# Altium PCB radxa_nx5_io_board_v1.4.PcbDoc (part 4 of 6)
Units mil, origin at the board's own origin, x right, y up, seen from the top; angles counter-clockwise.
Board outline 3937.73 x 3112.19 mil, 6 copper layers (Top, GND02, 内层3, Power4, 内层 5, Bottom), stack 58.1 mil thick; 363 components, 344 nets, 1618 pads, 1594 vias.
Unrouted connection lines stored in the file: 899.
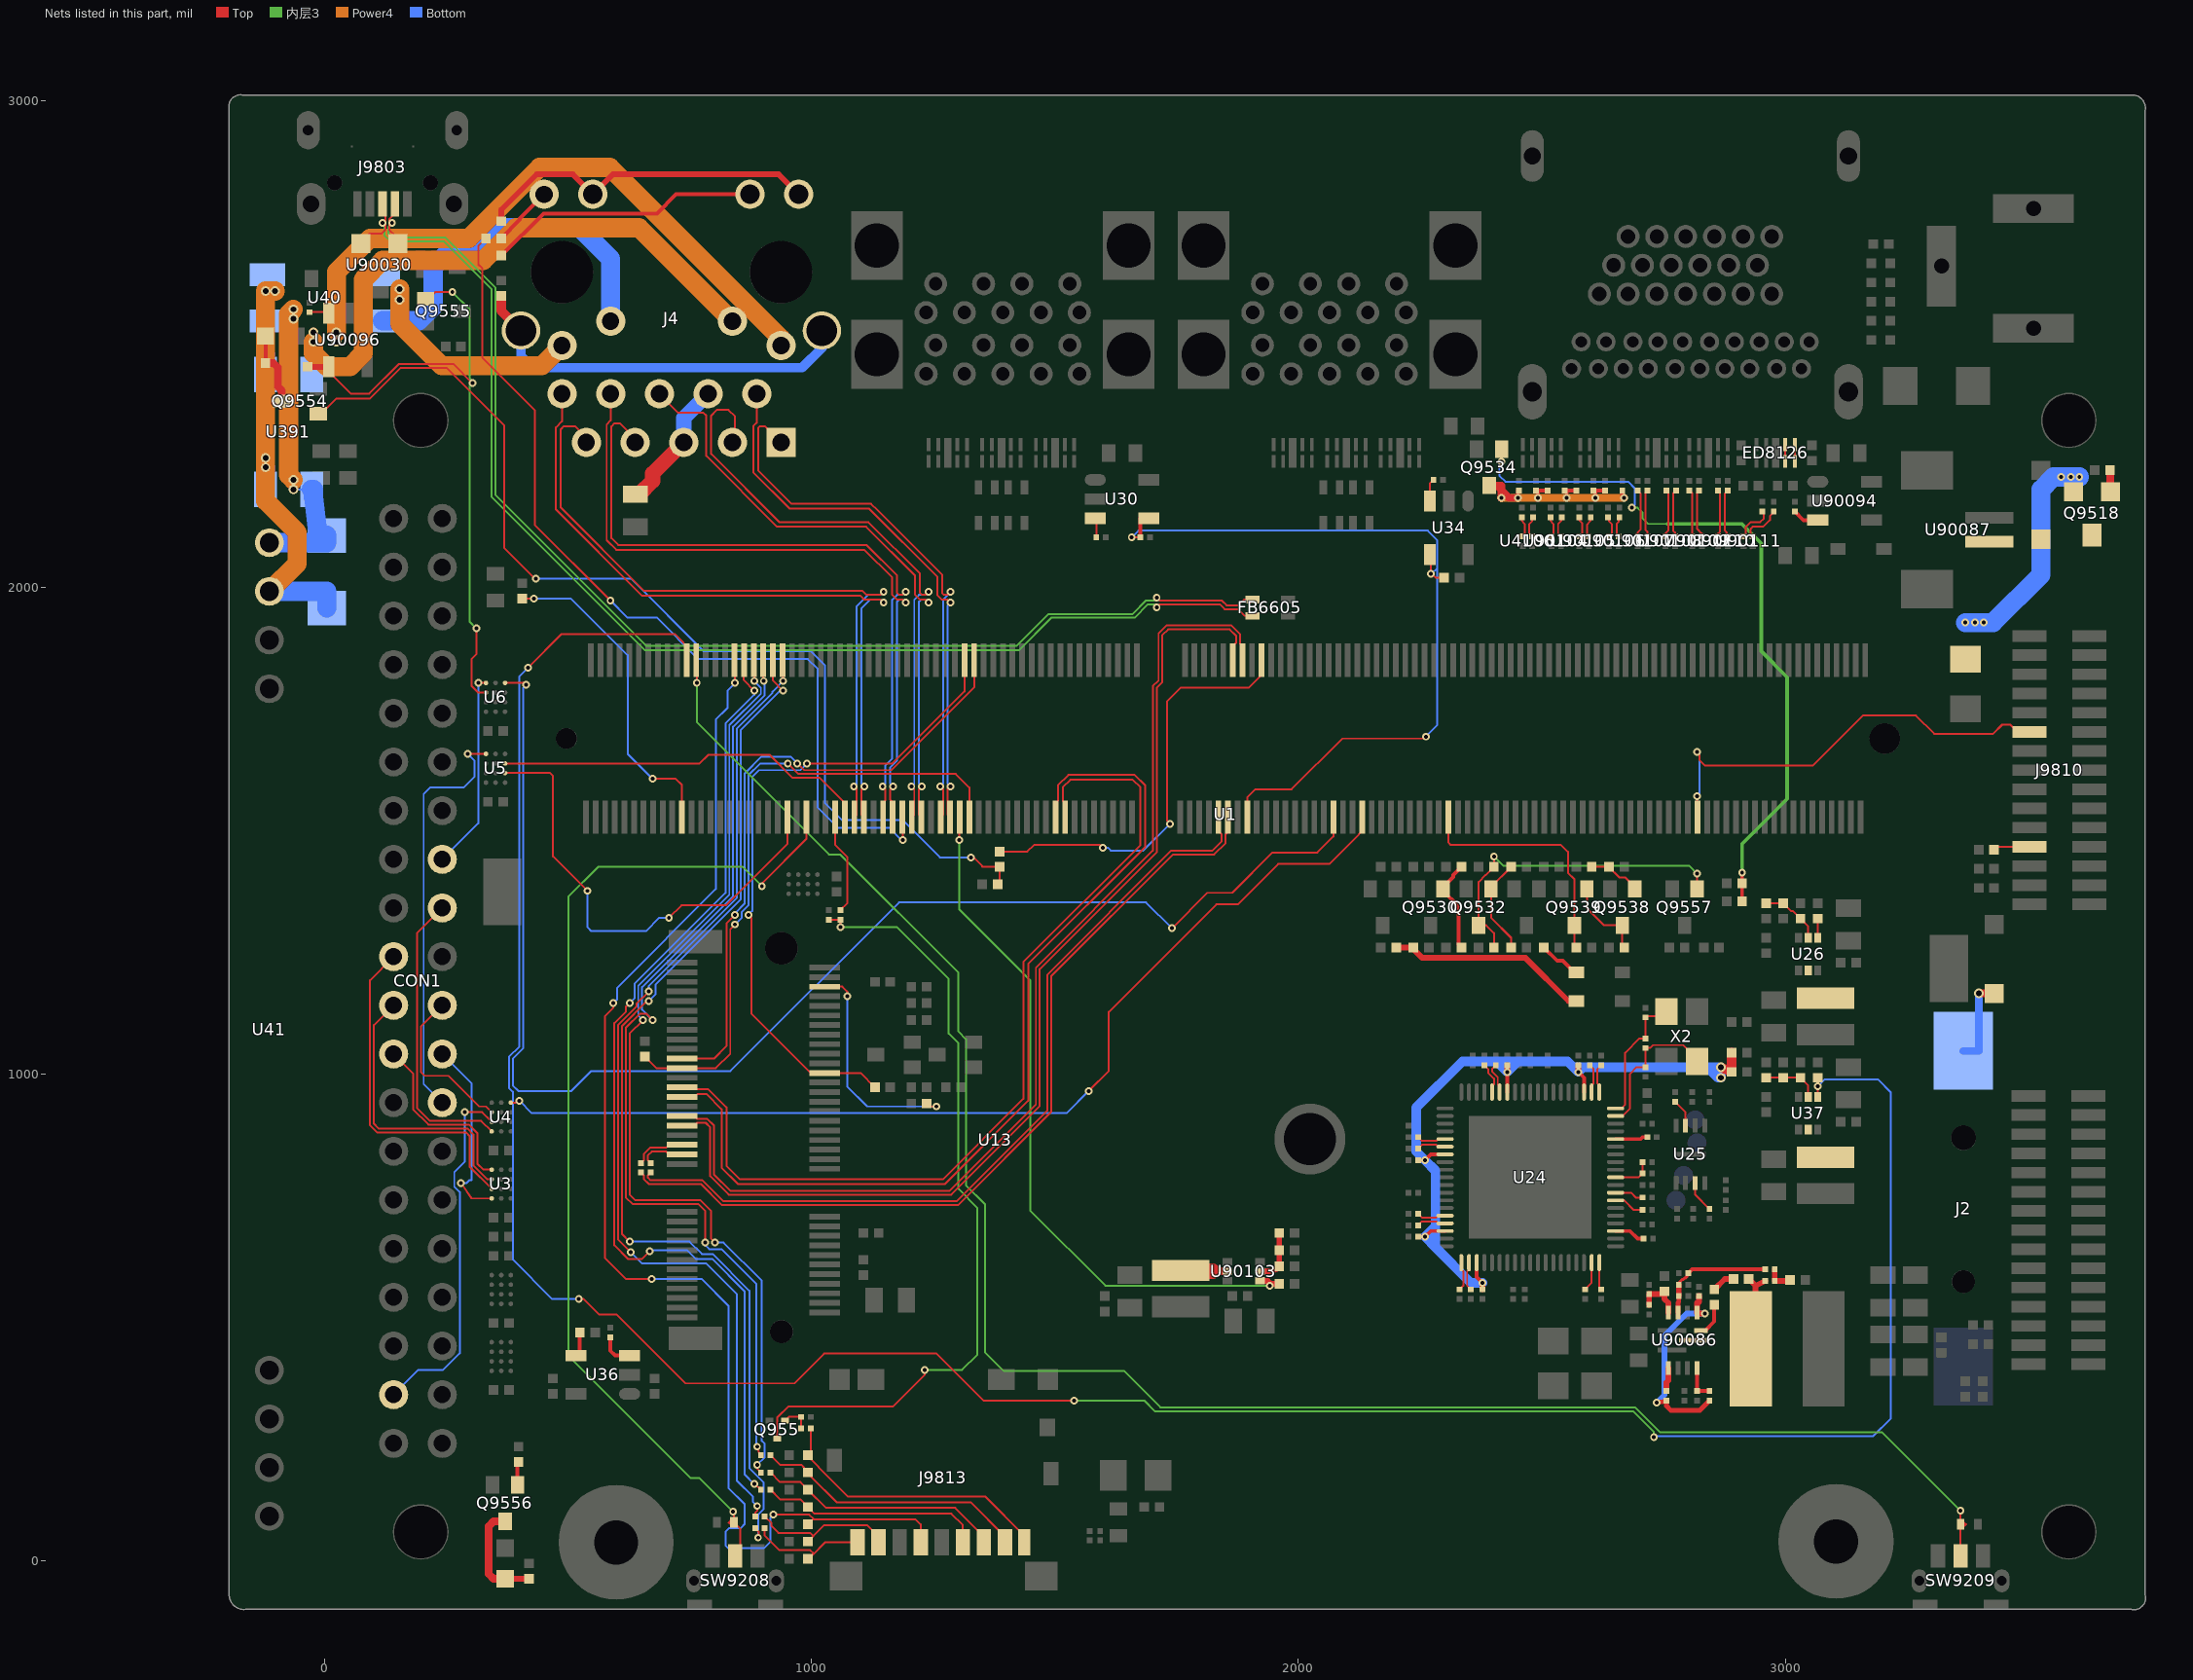
[diagram p7: the nets of this part, all layers, seen from the top]

## Via types
v1: diameter 15.75, hole 7.87, Top to Bottom, 1425 vias
v2: diameter 19.68, hole 11.81, Top to Bottom, 169 vias

## Nets (pads, with @x,y where several pads share a name; then routed paths per layer and width w, separated by ;. In a path a pad name is that pad's centre, name@x,y a point inside that pad or via, vN(x,y) a via of type N, cw(c..) or ccw(c..) an arc to the next point about the centre after c; other vN are vias at no path point) (continued)
MIPI_DPHY0_RX_D1P: J9810.10 U1.36 | length 912.1
  Top w3.94: v1(2818.9,1570.87) 2818.9,1527.56 U1.36@2819.88,1527.56 ; v1(2818.9,1661.42) 2823.82,1656.5 2823.82,1644.69 2834.65,1633.86 3057.09,1633.86 3159.45,1736.22 3268.7,1736.22 3306.1,1698.82 3427.17,1698.82 3445.87,1717.52 3462.6,1717.52 3477.36,1702.76 J9810.10@3501.97,1702.76
  Bottom w3.94: v1(2818.9,1570.87) 2823.82,1575.79 2823.82,1656.5 v1(2818.9,1661.42)
N31363: C63.2 J4.4 J4.5 | length 272.7
  Top w31.5: C63.2@637.8,2190.94 645.67,2190.94 673.23,2218.5 673.23,2233.46 J4.5@737.01,2297.24
  Bottom w31.5: J4.5@737.01,2297.24 737.01,2347.24 J4.4@787.01,2397.24
N31433: J4.12 U391.1 | length 1253
  Power4 w19.68: v2(-23.62,2503.94) v2(-23.62,2523.62)
  Power4 w39.37: v2(-23.62,2503.94) -23.62,2480.32 3.94,2452.76 51.18,2452.76 78.74,2480.32 78.74,2631.89 118.11,2671.26 325.28,2671.26 392.21,2738.19 645.28,2738.19 J4.12@837.01,2546.46
  Bottom w3.94: -23.62,2513.78 v2(-23.62,2523.62)
  Bottom w39.37: U391.1@-122.05,2437.01 -122.05,2478.35
N31443: J4.11 U391.2 | length 1305.7
  Power4 w19.68: v2(23.62,2503.94) v2(23.62,2523.62)
  Power4 w39.37: v2(23.62,2523.62) 23.62,2647.64 92.52,2716.54 295.28,2716.54 440.94,2862.2 585.29,2862.2 937.01,2510.49 J4.11@937.01,2496.46
N31463: J4.14 U40.1 | length 457.5
  Power4 w39.37: v2(153.54,2612.2) 153.54,2541.34 240.16,2454.72 445.28,2454.72 J4.14@487.01,2496.46
  other v2: 153.54,2590.55
N31467: J4.13 U40.2 | length 749.6
  Bottom w39.37: U40.2@118.11,2547.24 192.91,2547.24 222.44,2576.77 222.44,2657.48 259.84,2694.88 318.9,2694.88 362.2,2738.19 523.23,2738.19 587.01,2674.41 J4.13@587.01,2546.46
N8208224: R103.1 U24.46 | length 59.2
  Top w3.94: U24.46@2651.57,755.91 2683.07,755.91 2692.91,746.06 R103.1@2706.69,746.06
N8208306: C92.1 C96.1 C97.1 C98.1 C99.1 C100.1 FB1.2 U24.7 U24.17 U24.22 U24.60 U24.70 | length 1824
  Top w7.87: C99.1@2246.06,665.35 v1(2259.84,665.35) 2271.65,677.17 U24.17@2301.18,677.17 ; C98.1@2246.06,822.83 v1(2259.84,822.83) 2271.65,834.65 U24.7@2301.18,834.65 ; U24.22@2366.14,612.2 2366.14,582.68 v1(2377.95,570.87) ; U24.70@2429.13,962.6 v1(2429.13,1003.94) ; v1(2574.8,1003.94) 2586.61,992.13 U24.60@2586.61,962.6
  Top w11.81: C100.1@2377.95,557.09 v1(2377.95,570.87) ; v1(2429.13,1003.94) C97.1@2429.13,1017.72 ; v1(2574.8,1003.94) C96.1@2574.8,1017.72
  Top w19.68: v2(2868.11,1013.78) C92.1@2889.76,1003.94 FB1.2@2889.76,1043.31
  Bottom w19.68: v1(2377.95,570.87) 2354.33,570.87 2281.5,643.7 ; 2281.5,643.7 2281.5,687.01 ; 2281.5,643.7 v1(2259.84,665.35) 2281.5,687.01 ; 2281.5,643.7 2281.5,801.18 ; 2281.5,687.01 2281.5,801.18 ; 2281.5,801.18 v1(2259.84,822.83) 2242.13,840.55 2242.13,931.04 2336.67,1025.59 2407.48,1025.59 ; 2407.48,1025.59 v1(2429.13,1003.94) 2450.79,1025.59 ; 2407.48,1025.59 2450.79,1025.59 ; 2450.79,1025.59 2553.15,1025.59 2564.96,1013.78 ; 2564.96,1013.78 v1(2574.8,1003.94) 2584.65,1013.78 ; 2564.96,1013.78 2584.65,1013.78 ; 2584.65,1013.78 2842.52,1013.78 ; 2842.52,1013.78 2842.52,1011.53 2861.93,992.13 v2(2868.11,992.13) v2(2868.11,1013.78) 2842.52,1013.78
N8208450: C72.1 U24.59 | length 60
  Top w3.94: C72.1@2598.43,1017.72 2606.3,1009.84 2606.3,980.32 2602.36,976.38 U24.59@2602.36,962.6
N8208452: C73.1 U24.58 | length 60
  Top w3.94: U24.58@2618.11,962.6 2618.11,976.38 2614.17,980.32 2614.17,1009.84 C73.1@2622.05,1017.72
N8208466: C74.1 U24.21 | length 60
  Top w3.94: U24.21@2350.39,612.2 2350.39,598.43 2346.46,594.49 2346.46,564.96 C74.1@2354.33,557.09
N8208470: C75.1 U24.20 | length 60
  Top w3.94: C75.1@2330.71,557.09 2338.58,564.96 2338.58,594.49 2334.65,598.43 U24.20@2334.65,612.2
N8208482: C77.1 U24.16 | length 60
  Top w3.94: C77.1@2246.06,688.98 2253.94,696.85 2283.46,696.85 2287.4,692.91 U24.16@2301.18,692.91
N8208486: C78.1 U24.15 | length 60
  Top w3.94: C78.1@2246.06,712.6 2253.94,704.72 2283.46,704.72 2287.4,708.66 U24.15@2301.18,708.66
N8208498: C79.1 U24.6 | length 60
  Top w3.94: C79.1@2246.06,846.46 2253.94,854.33 2283.46,854.33 2287.4,850.39 U24.6@2301.18,850.39
N8208502: C80.1 U24.5 | length 60
  Top w3.94: C80.1@2246.06,870.08 2253.94,862.2 2283.46,862.2 2287.4,866.14 U24.5@2301.18,866.14
N8208518: C83.1 R101.1 U24.57 X2.1 | length 274.3
  Top w3.94: U24.57@2651.57,929.13 2663.39,929.13 2671.26,937.01 2671.26,1043.31 2700.79,1072.83 R101.1@2712.6,1072.83 C83.1@2712.6,1116.14 2714.57,1118.11 2732.28,1118.11 2742.13,1127.95 X2.1@2755.91,1127.95
N8208522: C84.1 R101.2 U24.56 X2.3 | length 309
  Top w3.94: U24.56@2651.57,913.39 2665.35,913.39 2681.1,929.13 2681.1,1000 2694.88,1013.78 C84.1@2712.6,1013.78 R101.2@2712.6,1053.15 2722.44,1053.15 2728.35,1059.06 2790.35,1059.06 2818.9,1030.51 X2.3@2818.9,1025.59
N8208552: R96.2 U24.38 | length 56.7
  Top w3.94: U24.38@2618.11,612.2 2618.11,561.02 R96.2@2622.05,557.09
N8208556: R97.2 U24.37 | length 60.8
  Top w3.94: R97.2@2588.58,557.09 2602.36,570.87 U24.37@2602.36,612.2
N8208578: C76.1 R99.2 U24.48 | length 82
  Top w3.94: U24.48@2651.57,787.4 2698.82,787.4 R99.2@2706.69,795.28 C76.1@2706.69,818.9
N8214601: R95.2 U24.45 | length 63.3
  Top w3.94: U24.45@2651.57,740.16 2669.29,740.16 2688.98,720.47 R95.2@2706.69,720.47
N8214608: R98.2 U24.53 | length 66.6
  Top w7.87: U24.53@2651.57,866.14 2702.76,866.14 2706.69,870.08 R98.2@2716.54,870.08
N8219540: R106.2 U25.3 | length 58.2
  Top w3.94: R106.2@2773.62,942.91 2795.28,921.26 U25.3@2795.28,893.7
N8219562: R105.1 U25.7 | length 65.4
  Top w3.94: U25.7@2814.96,775.59 2814.96,751.97 R105.1@2844.49,722.44
N16880188: R116.1 U34.3 | length 46.6
  Top w3.94: U34.3@2269.69,2177.17 2269.69,2212.6 R116.1@2277.56,2220.47
N16895636: C55.1 U13.37 | length 106.8
  Top w3.94: C55.1@649.61,816.93 655.51,822.83 655.51,835.94 668,848.43 700.79,848.43 706.69,854.33 U13.37@733.27,854.33
N16895637: C54.1 U13.35 | length 93.8
  Top w3.94: C54.1@669.29,816.93 663.39,822.83 663.39,832.68 671.26,840.55 700.79,840.55 706.69,834.65 U13.35@733.27,834.65
N16926774: J4.16 R76.2 | length 563.2
  Top w7.87: R76.2@362.2,2681.1 448.82,2767.72 682.25,2767.72 721.62,2807.09 J4.16@873.23,2807.09
N16926816: J4.18 R77.2 | length 127.1
  Top w7.87: R77.2@362.2,2716.54 400.61,2754.94 400.61,2757.31 J4.18@450.39,2807.09
N16926840: J4.15 J4.17 R75.2 | length 716
  Top w11.81: R75.2@362.2,2751.97 362.2,2775.24 435.39,2848.43 509.06,2848.43 J4.17@550.39,2807.09 591.73,2848.43 931.89,2848.43 J4.15@973.23,2807.09
N16927009: J4.19 J4.20 R78.2 | length 821.3
  Top w19.68: R78.2@362.2,2598.43 362.2,2567.72 J4.20@402.76,2527.16
  Bottom w19.68: J4.20@402.76,2527.16 402.76,2474.41 426.38,2450.79 980.32,2450.79 1020.86,2491.34 J4.19@1020.86,2527.16
N16942624: L4.1 U37.2
N16942632: C119.2 R123.2 R125.1 U37.5 | length 116.8
  Top w3.94: C119.2@2960.63,992.13 R123.2@2996.06,992.13 R125.1@3031.5,992.13 3047.24,976.38 U37.5@3047.24,952.76
N16950563: R110.2 U26.4 | length 39.4
  Top w3.94: U26.4@3066.93,1279.53 R110.2@3066.93,1318.9
N16950595: L2.1 U26.2
N16950615: C104.2 R111.2 R112.1 U26.5 | length 129.8
  Top w3.94: C104.2@2960.63,1350.39 R111.2@2996.06,1350.39 3011.81,1334.65 3015.75,1334.65 R112.1@3031.5,1318.9 3047.24,1303.15 U26.5@3047.24,1279.53
N16960074: J9810.4 R126.2 | length 75.3
  Top w3.94: R126.2@3429.13,1460.63 3435.04,1466.54 J9810.4@3501.97,1466.54
N16982620: R109.2 U24.41 | length 63.6
  Top w7.87: U24.41@2651.57,677.17 2681.1,677.17 2696.85,661.42 R109.2@2708.66,661.42
N16984009: C124.1 U36.4 | length 55.1
  Top w7.87: U36.4@515.74,421.26 523.62,421.26 C124.1@523.62,468.5
N16984023: R124.2 U36.3 | length 71
  Top w7.87: R124.2@586.61,458.66 586.61,431.1 596.46,421.26 U36.3@625.98,421.26
N16984557: D1.1 J2.1 | length 181.2
  Top w15.75: v2(3397.64,1165.35) D1.1@3429.13,1165.35
  Bottom w15.75: J2.1@3366.14,1047.16 3397.64,1047.16 v2(3397.64,1165.35)
N17002194: D6.1 J9813.9 R953.1 | length 589.4
  Top w3.94: R953.1@998.03,271.65 998.03,216.54 D6.1@992.08,216.54 998.56,210.05 998.56,208.08 1013.78,192.87 1013.78,191.94 1073.83,131.89 1356.1,131.89 1436.52,51.48 J9813.9@1436.52,37.7
N17002200: Q955.3 R144.1 R145.2 | length 1622.9
  Top w3.94: Q955.3@929.04,250.39 929.04,293.69 952.28,316.93 1167.32,316.93 1232.28,381.89 v1(1232.28,391.73) ; R144.1@1035.43,1316.93 R145.2@1059.06,1316.93 v1(1059.06,1301.18)
  内层3 w3.94: v1(1059.06,1301.18) 1175.2,1301.18 1281.5,1194.88 1281.5,1082.68 1301.18,1062.99 1301.18,763.78 1340.55,724.41 1340.55,423.23 1309.06,391.73 v1(1232.28,391.73)
  Bottom w3.94: v1@1059.06,1297.24 v1(1059.06,1301.18) v1@1061.02,1299.21
N17002392: D11.1 J9813.2 R139.2 | length 505.2
  Top w3.94: R139.2@915.35,181.1 935.04,161.42 977.03,161.42 992.08,146.36 D11.1@992.08,145.67 1029.48,108.27 1295.08,108.27 1353.84,49.51 J9813.2@1353.84,37.7
N17002394: D10.1 J9813.3 R140.2 | length 460.9
  Top w3.94: R140.2@915.35,145.67 935.04,125.98 977.03,125.98 992.08,110.93 D10.1@992.08,110.24 1005.86,96.46 1286.91,96.46 1310.53,72.83 J9813.3@1310.53,37.7
N17002404: D7.1 J9813.8 R142.2 | length 262.1
  Top w3.94: R142.2@903.54,66.93 903.54,51.38 933.27,21.65 996.83,21.65 1003.31,15.17 D7.1@992.08,3.94 998.56,10.42 1000.53,10.42 1027.81,37.7 J9813.8@1094,37.7
N17002416: D12.1 J9813.1 R138.2 | length 565.1
  Top w3.94: R138.2@915.35,216.54 935.04,196.85 978.35,196.85 984.2,190.99 984.2,189.67 992.08,181.8 D12.1@992.08,181.1 998.56,174.62 998.56,172.65 1051.13,120.08 1326.57,120.08 1397.15,49.51 J9813.1@1397.15,37.7
N17002424: D8.1 J9813.7 R141.2 | length 316.1
  Top w3.94: R141.2@903.54,90.55 917.32,76.77 917.32,71.06 931.3,57.09 996.83,57.09 1003.31,50.6 D8.1@992.08,39.37 1025.54,72.83 1113.98,72.83 1137.3,49.51 J9813.7@1137.3,37.7
N17031686: D90009.1 U40.4 U41.2 U391.4 | length 904.9
  Power4 w39.37: U41.2@-114.17,1991.34 -57.09,2048.43 -57.09,2112.2 -122.05,2177.17 v2(-122.05,2246.06) v2(-122.05,2265.75) v2(-122.05,2608.27) v2(-102.36,2608.27)
  Bottom w19.68: v2(-122.05,2246.06) v2(-122.05,2265.75)
  Bottom w39.37: U391.4@-122.05,2200.79 v2(-122.05,2246.06) ; U41.2@-114.17,1991.34 3.94,1991.34 D90009.1@3.94,1956.69
N17031706: D90009.2 U40.3 U41.1 U391.3 | length 665.4
  Power4 w19.68: v2(-64.96,2200.79) v2(-64.96,2220.47)
  Power4 w39.37: v2(-64.96,2220.47) -74.8,2230.32 -74.8,2561.02 v2(-64.96,2570.87)
  Bottom w3.94: v2(-64.96,2200.79) U391.3@-27.56,2200.79
  Bottom w39.37: U41.1@-114.17,2091.34 3.94,2091.34 D90009.2@3.94,2106.3 -13.75,2106.3 -23.62,2184.25 -23.62,2200.79 U391.3@-27.56,2200.79
  other v2: -64.96,2551.18
N17064593: D5001.1 Q9518.3 U90087.1
N17064603: Q9518.1 R95059.1 | length 44.3
  Top w15.75: R95059.1@3667.32,2240.16 3667.92,2239.56 Q9518.1@3667.92,2196.11
N17064628: Q9518.2 R95060.1 | length 460.9
  Bottom w3.94: v1(3407.48,1927.17) v1(3407.48,1927.17)
  Bottom w39.37: v1(3370.08,1927.17) v1(3389.76,1927.17) v1(3407.48,1927.17) 3427.17,1927.17 3525.59,2025.59 3525.59,2200.79 3551.18,2226.38 v1(3566.93,2226.38) v1(3586.61,2226.38) v1(3604.33,2226.38)
N17079172: C90523.2 L5001.1 R95050.1 U90086.7 | length 181.5
  Top w11.81: C90523.2@2925.2,578.74 2939.22,564.72 ; L5001.1@2929.14,435.04 2939.22,435.04 2939.22,564.72 ; R95050.1@2958.66,574.8 2939.22,564.72
N17079176: C90520.1 R95050.2 R95052.1 | length 57.1
  Top w11.81: R95052.1@2978.35,598.43 R95050.2@2978.35,574.8 3009.84,574.8 C90520.1@3009.84,576.77
N17079190: R95051.2 R95052.2 R95055.1 R95188.1 U90086.11 | length 257.7
  Top w5.91: R95055.1@2781.5,566.93 2781.5,568.78 2779.65,568.78 2788.13,577.26 2789.86,577.26 2792.82,580.22 2794.54,580.22 2803.03,588.7 2801.18,588.7 R95051.2@2801.18,590.55
  Top w7.87: R95051.2@2801.18,590.55 2809.06,598.43 R95052.2@2958.66,598.43
  Top w9.84: U90086.11@2779.53,509.84 2779.53,529.53 2781.5,531.5 R95188.1@2781.5,543.31
  Top w11.81: R95188.1@2781.5,543.31 R95055.1@2781.5,566.93
N17079234: C90424.1 R95048.1 R95054.2 U90086.12 | length 104.5
  Top w11.81: R95048.1@2720.47,525.59 R95054.2@2720.47,547.24 2750,547.24 2751.97,549.21 C90424.1@2751.97,553.15 2751.97,537.4 2759.84,529.53 U90086.12@2759.84,509.84
N17079242: C90426.1 R95056.1 R95057.1 U90086.9 | length 431.4
  Top w9.84: v1(2736.22,324.8) 2755.91,327.91 R95056.1@2755.91,328.74 2755.91,317.91 2764.76,309.06 2824.8,309.06 R95057.1@2844.49,328.74
  Top w11.81: C90426.1@2822.83,543.31 2822.83,531.5 2820.87,529.53 2818.9,529.53 U90086.9@2818.9,509.84 2818.9,507.87 v1(2834.65,507.87)
  Bottom w11.81: v1(2736.22,324.8) 2751.97,340.55 2751.97,462.06 2797.78,507.87 v1(2834.65,507.87)
N17079252: R95056.2 U90086.3 | length 48.9
  Top w11.81: R95056.2@2755.91,348.43 2755.91,366.14 2759.84,370.08 U90086.3@2759.84,395.67
N17079260: R95057.2 R95058.1 U90086.6 | length 72.8
  Top w7.87: U90086.6@2818.9,395.67 R95058.1@2818.9,348.43 R95057.2@2844.49,348.43
N17079270: R95046.1 U90086.8 | length 69.8
  Top w7.87: U90086.8@2826.77,472.44 2835.63,472.44 2854.33,491.14 R95046.1@2854.33,525.59
N17079276: C90523.1 R95046.2 | length 48.3
  Top w11.81: R95046.2@2854.33,557.09 2875.98,578.74 C90523.1@2893.7,578.74
N17107180: ED8126.4 ED8126.7 | length 34.4
  Top w3.94: ED8126.4@3000,2258.37 ED8126.7@3000,2292.82
N17107189: ED8126.5 ED8126.6 | length 34.4
  Top w3.94: ED8126.5@3019.69,2258.37 ED8126.6@3019.69,2292.82
N17107297: Q9538.1 R95115.2 R95116.1 | length 109.6
  Top w3.94: R95115.2@2602.36,1425.2 R95116.1@2637.8,1425.2 2659.45,1403.54 2671.26,1403.54 2690.94,1383.86 Q9538.1@2690.94,1379.92
N17107326: Q9538.3 Q9539.1 R95117.1 | length 180
  Top w3.94: Q9539.1@2592.52,1379.92 2592.52,1340.55 2627.95,1305.12 Q9538.3@2665.35,1305.12 ; Q9538.3@2665.35,1301.18 Q9538.3@2665.35,1305.12 ; R95117.1@2669.29,1259.84 2665.35,1259.84 Q9538.3@2665.35,1305.12
N17107457: R95121.1 U90094.3 | length 54.6
  Top w7.87: R95121.1@3019.69,2155.51 3037.4,2137.8 U90094.3@3066.93,2137.8
N17108007: C90485.2 R95225.2 U90111.2 | length 85.8
  Top w3.94: U90111.2@2916.14,2104.33 R95225.2@2913.39,2104.33 2919.29,2110.24 2919.29,2124.02 2929.13,2133.86 2948.82,2133.86 2956.24,2141.28 2956.24,2154 2954.72,2155.51 C90485.2@2952.76,2155.51
N17108009: C90486.2 R95226.2 U90111.1 | length 86.6
  Top w3.94: U90111.1@2935.04,2104.33 R95226.2@2933.07,2104.33 2929.13,2110.24 2929.13,2118.11 2929.13,2120.08 2933.07,2124.02 2954.72,2124.02 2968.5,2137.8 2968.5,2145.67 2976.38,2153.54 C90486.2@2976.38,2155.51
N17108059: Q9534.3 R95101.2 R95102.2 R95103.2 R95104.2 R95106.2 R95107.2 R95108.2 R95109.2 | length 768.3
  Top w7.87: v1(2450.79,2183.07) 2450.79,2198.82 R95109.2@2452.76,2198.82 ; v1(2492.13,2183.07) 2492.13,2194.88 R95108.2@2488.19,2198.82 R95102.2@2511.81,2198.82 ; v1(2551.18,2183.07) 2551.18,2194.88 R95101.2@2547.24,2198.82 R95104.2@2570.87,2198.82 ; v1(2610.24,2183.07) 2610.24,2196.85 2608.27,2198.82 R95103.2@2606.3,2198.82 R95107.2@2629.92,2198.82 ; R95106.2@2665.35,2198.82 2665.35,2187.01 v1(2669.29,2183.07)
  Top w15.75: v1(2417.32,2183.07) 2417.32,2208.66 ; v1(2450.79,2183.07) 2433.07,2183.07 2407.48,2208.66 ; 2407.48,2208.66 2411.42,2208.66 ; 2407.48,2208.66 2405.51,2208.66 2411.42,2208.66 ; 2407.48,2208.66 Q9534.3@2391.73,2208.66 2417.32,2208.66 ; 2411.42,2208.66 2417.32,2208.66
  Power4 w7.87: v1(2450.79,2183.07) v1(2492.13,2183.07) v1(2551.18,2183.07) v1(2610.24,2183.07) v1(2669.29,2183.07)
  Power4 w15.75: v1(2417.32,2183.07) v1(2669.29,2183.07)
N17108472: D5005.2 R95095.1 R95098.1 | length 424.1
  Top w11.81: R95095.1@2200.79,1259.84 R95098.1@2236.22,1259.84 2236.22,1258.11 2234.49,1258.11 2254.41,1238.19 2466.54,1238.19 2555.12,1149.61 D5005.2@2570.87,1149.61 D5005.2@2566.93,1149.61
N17108523: Q9532.1 R95105.1 R95110.2 | length 199.6
  Top w3.94: R95110.2@2437.01,1259.84 2437.01,1279.53 2395.67,1320.87 Q9532.1@2395.67,1379.92 2395.67,1383.86 R95105.1@2437.01,1425.2
N17108536: Q9532.3 Q9557.1 R95100.1 R95114.2 | length 686.1
  Top w3.94: R95100.1@2401.57,1259.84 2401.57,1289.37 2385.83,1305.12 Q9532.3@2370.08,1305.12 2370.08,1394.18 2384.65,1408.75 2385.13,1408.75 R95114.2@2401.57,1425.2 v1(2401.57,1446.85) ; Q9557.1@2818.9,1379.92 v1(2818.9,1411.42)
  内层3 w3.94: v1(2401.57,1446.85) 2421.26,1427.17 2803.15,1427.17 v1(2818.9,1411.42)
N17108544: D5007.2 R95112.1 | length 88.1
  Top w7.87: R95112.1@2503.94,1259.84 2531.5,1232.28 2543.31,1232.28 2566.93,1208.66 D5007.2@2570.87,1208.66
N17108551: C90472.1 Q9530.1 R95097.2 | length 196.3
  Top w7.87: R95097.2@2334.65,1259.84 2328.74,1265.75 2328.74,1344.49 2297.24,1375.98 Q9530.1@2297.24,1379.92 2297.24,1383.86 2317.91,1404.53 2317.91,1408.46 C90472.1@2334.65,1425.2
N17108846: C300.1 R95217.2 U90107.2 | length 100.2
  Top w3.94: C300.1@2696.85,2198.82 2702.76,2192.91 2702.76,2125.98 2702.76,2118.11 2696.85,2112.2 R95217.2@2696.85,2104.33 U90107.2@2697.64,2104.33
N17108860: C90479.1 R95218.2 U90107.1 | length 97.3
  Top w3.94: U90107.1@2716.54,2104.33 2716.54,2114.17 2712.6,2118.11 2712.6,2192.91 C90479.1@2716.54,2198.82
N17108862: C90478.1 R95219.2 U90108.2 | length 101.7
  Top w3.94: U90108.2@2754.72,2104.33 R95219.2@2753.94,2104.33 2751.97,2104.33 2751.97,2108.27 2759.84,2116.14 2759.84,2192.91 C90478.1@2755.91,2198.82
N17108864: C90477.1 R95220.2 U90108.1 | length 98.6
  Top w3.94: U90108.1@2773.62,2104.33 2773.62,2112.2 2769.69,2116.14 2769.69,2192.91 C90477.1@2775.59,2198.82
N17108866: C90526.1 R95223.2 U90110.2 | length 98.1
  Top w3.94: C90526.1@2862.2,2198.82 2866.14,2192.91 2866.14,2114.17 2862.2,2110.24 R95223.2@2862.2,2104.33 U90110.2@2862.99,2104.33
N17108868: C90473.1 R95224.2 U90110.1 | length 99.4
  Top w3.94: U90110.1@2881.89,2104.33 2879.92,2106.3 2879.92,2112.2 2875.98,2116.14 2875.98,2192.91 C90473.1@2881.89,2198.82
N17108874: C90476.1 R95221.2 U90109.2 | length 97.7
  Top w3.94: C90476.1@2803.15,2198.82 2809.06,2192.91 R95221.2@2809.06,2104.33 U90109.2@2809.84,2104.33
N17108876: C90527.1 R95222.2 U90109.1 | length 99.8
  Top w3.94: C90527.1@2822.83,2198.82 2818.9,2192.91 2818.9,2120.08 2828.74,2110.24 U90109.1@2828.74,2104.33
N17110549: FB6605.1 J9803.2 U90030.1 | length 2559.3
  Top w3.94: v1(137.8,2748.03) v1@131.89,2748.03 ; J9803.2@143.7,2787.4 139.76,2787.4 139.76,2773.05 141.73,2771.08 141.73,2765.75 131.89,2755.91 v1@131.89,2748.03 ; U90030.1@150.2,2705.95 150.14,2706.02 150.14,2720.47 146.82,2723.79 142.36,2723.79 131.89,2734.25 v1@131.89,2748.03 ; v1(1708.66,1978.35) 1714.57,1972.44 1842.52,1972.44 1852.36,1962.6 1875.98,1962.6 1887.8,1974.41 FB6605.1@1905.51,1974.41
  内层3 w3.94: v1(137.8,2748.03) 129.92,2740.16 129.92,2726.38 137.8,2718.5 247.16,2718.5 350.39,2615.27 350.39,2189.17 659.65,1879.92 1421.5,1879.92 1486.46,1944.88 1659.45,1944.88 1687.01,1972.44 1702.76,1972.44 v1(1708.66,1978.35)
N17110551: FB6605.3 J9803.3 U90030.2 | length 2605.1
  Top w3.94: U90030.2@74.2,2705.95 83.42,2705.95 87.64,2710.17 87.64,2718.22 85.39,2720.47 90.92,2726.01 115.77,2726.01 124.02,2734.25 v1@124.02,2748.03 ; v1(118.11,2748.03) v1@124.02,2748.03 ; J9803.3@118.11,2787.4 116.14,2789.37 116.14,2769.69 124.02,2761.81 v1@124.02,2748.03 ; v1(1708.66,1958.66) 1714.57,1964.57 1838.58,1964.57 1848.43,1954.72 1875.98,1954.72 1889.76,1940.94 FB6605.3@1905.51,1940.94
  内层3 w3.94: v1(118.11,2748.03) 122.05,2744.09 122.05,2723.12 134.53,2710.63 243.9,2710.63 342.52,2612.01 342.52,2185.04 657.48,1870.08 1425.2,1870.08 1492.13,1937.01 1663.39,1937.01 1690.94,1964.57 1702.76,1964.57 v1(1708.66,1958.66)
N17112107: R95195.1 U90096.3 | length 40.2
  Top w3.94: R95195.1@-31.5,2564.96 5.91,2564.96 U90096.3@7.87,2562.99
N17115433: L90015.1 U90103.2 | length 98.4
  Top w15.75: L90015.1@1757.87,594.49 L90015.1@1757.87,596.46 ; 1822.83,594.49 U90103.2@1854.33,594.49
  Top w31.5: L90015.1@1757.87,594.49 1822.83,594.49
N17115441: C90529.2 R95199.2 R95200.1 U90103.5 | length 113.6
  Top w11.81: U90103.5@1921.26,594.49 1944.88,594.49 1956.69,600.39 1960.63,600.39 R95199.2@1960.63,604.33 C90529.2@1960.63,637.8 R95200.1@1960.63,673.23
N17115964: R95202.2 U13.70 | length 471
  Top w3.94: U13.70@1026.58,1179.14 1062.99,1179.14 1072.83,1169.29 v1(1072.83,1159.45) ; R95202.2@1236.22,938.98 1236.22,933.07 v1(1255.91,933.07)
  Bottom w3.94: v1(1072.83,1159.45) 1072.83,974.41 1114.17,933.07 v1(1255.91,933.07)
N17118013: LED705.1 Q9554.3 R95198.1 | length 156.9
  Top w7.87: R95198.1@-122.05,2460.63 LED705.1@-122.05,2515.75
  Top w15.75: R95198.1@-122.05,2460.63 -106.3,2460.63 -96.46,2450.79 -96.46,2411.42 -88.58,2403.54 Q9554.3@-88.58,2381.89
N17118037: LED706.1 Q9556.3 R95203.1 | length 222.7
  Top w11.81: LED706.1@370.08,-37.4 R95203.1@419.29,-37.4
  Top w15.75: LED706.1@370.08,-37.4 346.46,-37.4 336.61,-27.56 336.61,70.87 346.46,80.71 Q9556.3@370.08,80.71
N17118080: Q9556.1 R95204.2 | length 48.1
  Top w7.87: Q9556.1@395.67,155.51 395.67,200.79 R95204.2@397.64,202.76
N17118132: Q9554.1 R95180.2 R95181.1 | length 2218.4
  Top w3.94: Q9554.1@-13.78,2356.3 -7.87,2356.3 23.62,2387.8 92.52,2387.8 155.51,2450.79 250,2450.79 368.11,2332.68 368.11,2080.71 432.09,2016.73 v1(433.07,2017.72) ; v1(1326.77,1444.88) 1332.68,1444.88 1350.39,1427.17 1350.39,1425.2 R95180.2@1385.83,1425.2 1385.83,1389.76 R95181.1@1381.89,1389.76
  Bottom w3.94: v1(433.07,2017.72) 628.63,2017.72 778.23,1868.11 998.65,1868.11 1027.56,1839.2 1027.56,1556.05 1061.95,1521.65 1186.59,1521.65 1263.36,1444.88 v1(1326.77,1444.88)
N17129892: Q955.1 R951.1 R953.2 | length 60.3
  Top w3.94: Q955.1@944.88,287.4 952.76,295.28 R951.1@978.35,295.28 R953.2@978.35,271.65
N17150645: Q9534.1 R95207.2 R95208.2 | length 1487.8
  Top w3.94: v1(2417.32,2257.87) Q9534.1@2417.32,2283.46
  Top w7.87: R95207.2@2911.42,1354.33 R95208.2@2911.42,1389.76 ; R95208.2@2911.42,1391.73 R95208.2@2911.42,1389.76 ; v1(2911.42,1413.39) R95208.2@2911.42,1389.76
  内层3 w3.94: v1(2685.04,2163.39) 2696.85,2163.39 2706.69,2153.54 2706.69,2141.73 2718.5,2129.92 2757.87,2129.92
  内层3 w7.87: 2757.87,2129.92 2910.84,2129.92 2950.79,2089.98 2950.79,1868.11 3003.94,1814.96 3003.94,1564.96 2911.42,1472.44 v1(2911.42,1413.39)
  Bottom w3.94: v1(2417.32,2257.87) 2417.32,2255.91 2413.39,2251.97 2413.39,2228.35 2425.2,2216.54 2677.17,2216.54 2690.94,2202.76 2690.94,2169.29 v1(2685.04,2163.39)
N17157031: C90461.1 R95209.1 U4106.4 | length 42.8
  Top w3.94: C90461.1@2458.66,2143.7 2459.01,2143.35 2459.01,2136.41 2464.57,2129.92 2464.57,2110.24 U4106.4@2460.63,2104.33
N17157067: C90462.1 R95210.1 U4106.3 | length 47
  Top w3.94: U4106.3@2479.53,2104.33 R95210.1@2480.32,2104.33 2474.41,2110.24 2474.41,2129.92 2480.32,2135.83 2480.32,2143.7 C90462.1@2482.28,2143.7
N17157304: C90463.1 R95211.1 U90104.4 | length 42.8
  Top w3.94: C90463.1@2517.72,2143.7 2518.06,2143.35 2518.06,2136.41 2523.62,2129.92 2523.62,2110.24 U90104.4@2519.69,2104.33
N17157326: C90464.1 R95212.1 U90104.3 | length 46.4
  Top w3.94: U90104.3@2538.58,2104.33 R95212.1@2539.37,2104.33 2533.46,2110.24 2533.46,2129.92 2540.35,2136.81 2540.35,2143.7 C90464.1@2541.34,2143.7
N17157441: C90465.1 R95213.1 U90105.4 | length 44.3
  Top w3.94: U90105.4@2576.77,2104.33 2582.68,2110.24 2582.68,2125.98 2582.68,2131.89 2576.77,2137.8 C90465.1@2576.77,2143.7
N17157463: C90466.1 R95214.1 U90105.3 | length 44.3
  Top w3.94: U90105.3@2595.67,2104.33 R95214.1@2596.46,2104.33 2592.52,2110.24 2592.52,2127.95 2599.84,2136.31 2600.39,2136.87 C90466.1@2600.39,2143.7
N17157576: C90467.1 R95215.1 U90106.4 | length 45.1
  Top w3.94: C90467.1@2635.83,2143.7 2637.8,2141.73 2637.8,2135.83 2643.7,2129.92 2643.7,2124.02 2643.7,2110.24 U90106.4@2637.8,2104.33
N17157598: C90468.1 R95216.1 U90106.3 | length 43.6
  Top w3.94: U90106.3@2656.69,2104.33 R95216.1@2657.48,2104.33 2653.54,2110.24 2653.54,2129.92 2658.13,2135.27 2658.13,2142.38 C90468.1@2659.45,2143.7
N64895143: R114.1 U30.3 | length 40.2
  Top w3.94: U30.3@1582.68,2141.73 1584.65,2139.76 R114.1@1584.65,2102.36
OTGVCC_EN: Q9555.1 R95197.2 U6.B1 U90096.4 | length 1343.1
  Top w3.94: U90096.4@7.87,2452.75 7.87,2442.91 53.15,2397.64 91.23,2397.64 152.25,2458.66 263.78,2458.66 v1(303.15,2419.29) ; Q9555.1@206.69,2592.52 212.6,2592.52 226.38,2606.3 v1(261.81,2606.3) ; v1(311.02,1915.35) 311.02,1862.11 301.18,1852.26 301.18,1797.44 315.16,1783.46 U6.B1@330.71,1783.46
  Top w11.81: R95197.2@-35.43,2452.76 U90096.4@7.87,2452.75
  内层3 w3.94: v1(261.81,2606.3) 297.24,2570.87 297.24,2429.13 303.15,2423.23 v1(303.15,2419.29) 297.24,2413.39 297.24,1929.13 v1(311.02,1915.35)
PCIE1-CLKREQ: R95201.2 U1.182 U90103.4 | length 1471.8
  Top w3.94: v1(1303.15,1480.32) 1303.15,1527.56 U1.182@1304.13,1527.56
  Top w11.81: U90103.4@1921.26,574.8 1937.01,574.8 v1@1942.91,568.9 ; v1(1940.94,564.96) v1@1942.91,568.9 ; R95201.2@1960.63,568.9 v1@1942.91,568.9
  内层3 w3.94: v1(1303.15,1480.32) 1303.15,1338.25 1448.82,1192.58 1448.82,719.38 1603.24,564.96 v1(1940.94,564.96)
PCIE20_0_REFCLKN: U1.160 U13.49 | length 1893.7
  Top w3.94: U13.49@733.27,972.44 759.84,972.44 763.78,968.5 787.54,968.5 824.8,931.24 824.8,811.16 852.5,783.46 1269.69,783.46 1435.04,948.82 1435.04,1230.32 1675.2,1470.47 1675.2,1588.58 1659.45,1604.33 1531.5,1604.33 1515.75,1588.58 1515.75,1561.02 1520.67,1556.1 U1.160@1520.67,1527.56
PCIE20_0_REFCLKP: U1.162 U13.47 | length 1943.4
  Top w3.94: U13.47@733.27,952.76 759.84,952.76 765.75,958.66 783.46,958.66 814.96,927.17 814.96,807.09 848.43,773.62 1273.76,773.62 1444.88,944.74 1444.88,1226.24 1685.04,1466.4 1685.04,1592.66 1663.53,1614.17 1527.42,1614.17 1505.91,1592.66 1505.91,1561.02 1500.98,1556.1 U1.162@1500.98,1527.56
PCIE20_0_RXN: U1.131 U13.43 | length 2232
  Top w3.94: U13.43@733.27,913.39 758.86,913.39 764.76,907.48 785.43,907.48 799.21,893.7 799.21,793.31 832.68,759.84 1283.46,759.84 1460.63,937.01 1460.63,1218.5 1700.79,1458.66 1700.79,1796.57 1712.6,1808.38 1712.6,1904.84 1729.02,1921.26 1862.2,1921.26 1879.92,1903.54 1879.92,1883.86 1884.84,1878.94 U1.131@1884.84,1850.39
PCIE20_0_RXP: U1.133 U13.41 | length 2219.8
  Top w3.94: U13.41@733.27,893.7 758.86,893.7 764.76,899.61 782.17,899.61 791.34,890.44 791.34,790.05 829.42,751.97 1286.73,751.97 1468.5,933.75 1468.5,1215.24 1708.66,1455.4 1708.66,1793.31 1720.47,1805.12 1720.47,1901.57 1732.28,1913.39 1858.94,1913.39 1872.05,1900.28 1872.05,1885.83 1865.16,1878.94 U1.133@1865.16,1850.39
PCIE20_0_TXN: C55.2 U1.134 | length 1759.9
  Top w3.94: C55.2@649.61,797.24 655.51,791.34 655.51,783.46 665.35,773.62 772.33,773.62 815.64,730.32 1300.51,730.32 1492.13,921.94 1492.13,1200.79 1742.13,1450.79 1826.77,1450.79 1850.39,1474.41 1850.39,1492.13 1855.32,1497.05 U1.134@1855.32,1527.56
PCIE20_0_TXP: C54.2 U1.136 | length 1734.6
  Top w3.94: C54.2@669.29,797.24 663.39,791.34 663.39,786.73 668.62,781.5 775.59,781.5 818.9,738.19 1297.24,738.19 1484.25,925.2 1484.25,1204.05 1738.86,1458.66 1823.51,1458.66 1842.52,1477.67 1842.52,1492.13 1835.63,1499.02 U1.136@1835.63,1527.56
PCIE20X1_2_CLKREQN_M0: R95227.1 U1.180 U13.53 | length 1329.9
  Top w3.94: R95227.1@657.48,1035.43 681.1,1011.81 U13.53@733.27,1011.81 803.15,1011.81 832.68,1041.34 832.68,1297.24 v1(842.52,1307.09) ; v1(950.79,1637.8) 972.44,1616.14 1296.03,1616.14 1323.82,1588.36 U1.180@1323.82,1527.56
  Bottom w3.94: v1(842.52,1307.09) 856.3,1320.87 856.3,1332.68 870.08,1346.46 870.08,1613.5 894.38,1637.8 v1(950.79,1637.8)
PCIE20X1_2_PERSTN_M0: R60.1 U1.181 U13.52 | length 1382
  Top w3.94: v1(870.08,1326.77) 875.98,1320.87 875.98,1124.02 998.03,1001.97 U13.52@1026.58,1001.97 1100.39,1001.97 R60.1@1129.92,972.44 ; v1(990.16,1637.8) 1166.03,1637.8 1313.98,1785.74 U1.181@1313.98,1850.39
  Bottom w3.94: v1(870.08,1326.77) 877.95,1334.65 877.95,1610.24 891.73,1624.02 976.38,1624.02 v1(990.16,1637.8)
PCIE20X1_2_WAKEN_M0/PWM8_M2: U1.179 U13.55 | length 1301.2
  Top w3.94: U13.55@733.27,1031.5 799.21,1031.5 824.8,1057.09 824.8,1309.06 v1(842.52,1326.77) ; v1(970.47,1637.8) 984.25,1624.02 1163.39,1624.02 1333.66,1794.29 U1.179@1333.66,1850.39
  Bottom w3.94: v1(842.52,1326.77) 842.52,1330.03 862.2,1349.72 862.2,1616.76 897.02,1651.57 956.69,1651.57 v1(970.47,1637.8)
PDM0_SDI0: U1.112 U6.A3 | length 2870.6
  Top w3.94: U6.A3@370.08,1803.15 409.45,1803.15 v1(413.39,1799.21) ; v1(1740.16,1299.21) 1812.99,1372.05 1864.06,1372.05 1946.73,1454.72 2038.69,1454.72 2071.85,1487.88 U1.112@2071.85,1527.56
  Bottom w3.94: v1(413.39,1799.21) 407.48,1793.31 407.48,1053.15 385.83,1031.5 385.83,976.38 397.64,964.57 505.91,964.57 547.24,1005.91 833.02,1005.91 1179.47,1352.36 1687.01,1352.36 v1(1740.16,1299.21)
PDM0_SDI2_M0: U1.106 U4.A3 | length 2101.3
  Top w3.94: U4.A3@381.89,940.94 391.73,940.94 395.67,944.88 v1(399.61,944.88) ; v1(1568.9,964.57) 1610.24,1005.91 1610.24,1127.28 1831.38,1348.43 1875.56,1348.43 1958.24,1431.1 2063.47,1431.1 2123.61,1491.24 2123.61,1491.72 2130.91,1499.02 U1.106@2130.91,1527.56
  Bottom w3.94: v1(399.61,944.88) 425.2,919.29 1523.62,919.29 v1(1568.9,964.57)
PHONE_CTL: R95180.1 U1.127 | length 885.1
  Top w3.94: R95180.1@1385.83,1456.69 1442.91,1456.69 1456.69,1470.47 1592.52,1470.47 v1(1598.43,1464.57) ; v1(1736.22,1513.78) 1730.32,1519.69 1730.32,1765.75 1757.87,1793.31 1897.64,1793.31 1924.21,1819.88 U1.127@1924.21,1850.39
  Bottom w3.94: v1(1598.43,1464.57) 1608.27,1464.57 1614.17,1458.66 1681.1,1458.66 v1(1736.22,1513.78)
PHY1_MDI_0+: J4.1 U1.186 | length 1151.3
  Top w3.94: J4.1@937.01,2297.24 903.54,2330.71 893.84,2330.71 889.76,2326.63 889.76,2240.3 958.8,2171.26 1122.05,2171.26 1135.83,2157.48 1267.72,2025.59 1267.72,1988.19 1271.65,1984.25 1279.53,1984.25 v1(1285.43,1990.16) ; v1(1263.78,1590.55) 1269.69,1584.65 1269.69,1532.48 U1.186@1264.76,1527.56
  Bottom w3.94: v1(1263.78,1590.55) 1269.69,1596.46 1269.69,1974.41 v1(1285.43,1990.16)
PHY1_MDI_0-: J4.2 U1.184 | length 1153.7
  Top w3.94: J4.2@887.01,2397.24 887.01,2337.8 879.92,2330.71 879.92,2236.22 954.72,2161.42 1117.97,2161.42 1257.87,2021.51 1257.87,1984.11 1267.58,1974.41 1279.53,1974.41 v1(1285.43,1968.5) ; U1.184@1284.45,1527.56 1279.53,1532.48 1279.53,1586.61 1283.46,1590.55 v1(1285.43,1590.55)
  Bottom w3.94: v1(1285.43,1590.55) 1279.53,1596.46 1279.53,1962.6 v1(1285.43,1968.5)
PHY1_MDI_1+: J4.3 U1.192 | length 1276.1
  Top w3.94: J4.3@837.01,2297.24 842.52,2302.76 842.52,2350.79 829.13,2364.17 805.12,2364.17 793.31,2352.36 793.31,2273.76 933.21,2133.86 1116.14,2133.86 1118.11,2131.89 1222.44,2027.56 1222.44,1988.33 1226.52,1984.25 1234.25,1984.25 v1(1240.16,1990.16) ; v1(1204.72,1590.55) 1210.63,1584.65 1210.63,1532.48 U1.192@1205.71,1527.56
  Bottom w3.94: v1(1204.72,1590.55) 1210.63,1596.46 1210.63,1974.41 1220.47,1984.25 1234.25,1984.25 v1(1240.16,1990.16)
PHY1_MDI_1-: J4.6 U1.190 | length 1275.7
  Top w3.94: J4.6@687.01,2397.24 725.98,2358.27 777.56,2358.27 783.46,2352.36 783.46,2269.69 929.13,2124.02 1112.06,2124.02 1212.6,2023.48 1212.6,1984.25 1222.44,1974.41 1234.25,1974.41 v1(1240.16,1968.5) ; U1.190@1225.39,1527.56 1220.47,1532.48 1220.47,1584.65 v1(1226.38,1590.55)
  Bottom w3.94: v1(1226.38,1590.55) 1220.47,1596.46 1220.47,1970.33 1224.55,1974.41 1234.25,1974.41 v1(1240.16,1968.5)
PHY1_MDI_2+: J4.7 U1.198 | length 1470.8
  Top w3.94: J4.7@637.01,2297.24 637.01,2305.12 605.51,2336.61 595.02,2336.61 588.58,2330.17 588.58,2100.53 602.5,2086.61 1112.15,2086.61 1175.2,2023.56 1175.2,1988.33 1179.27,1984.25 1187.01,1984.25 v1(1192.91,1990.16) ; v1(1145.67,1590.55) 1151.57,1584.65 1151.57,1562.01 1146.65,1557.09 U1.198@1146.65,1527.56
  Bottom w3.94: v1(1145.67,1590.55) 1151.57,1596.46 1151.57,1633.86 1165.35,1647.64 1165.35,1974.41 1175.2,1984.25 1187.01,1984.25 v1(1192.91,1990.16)
PHY1_MDI_2-: J4.8 U1.196 | length 1469.3
  Top w3.94: J4.8@587.01,2397.24 587.01,2342.52 578.74,2334.25 578.74,2096.46 598.43,2076.77 1108.07,2076.77 1165.35,2019.49 1165.35,1984.25 1175.2,1974.41 1187.01,1974.41 v1(1192.91,1968.5) ; U1.196@1166.34,1527.56 1166.34,1558.07 1161.42,1562.99 1161.42,1584.65 v1(1167.32,1590.55)
  Bottom w3.94: v1(1167.32,1590.55) 1161.42,1596.46 1161.42,1629.78 1175.2,1643.56 1175.2,1970.33 1179.27,1974.41 1187.01,1974.41 v1(1192.91,1968.5)
PHY1_MDI_3+: J4.9 U1.204 | length 1484.2
  Top w3.94: J4.9@537.01,2297.24 537.01,2307.09 513.39,2330.71 491.08,2330.71 484.25,2323.88 484.25,2163.53 655.65,1992.13 1104.33,1992.13 1112.2,1984.25 1141.73,1984.25 v1(1147.64,1990.16) ; v1(1086.61,1590.55) 1088.58,1590.55 1092.52,1586.61 1092.52,1532.48 U1.204@1087.6,1527.56
  Bottom w3.94: v1(1086.61,1590.55) 1092.52,1596.46 1092.52,1960.77 1116,1984.25 1141.73,1984.25 v1(1147.64,1990.16)
PHY1_MDI_3-: J4.10 U1.202 | length 1486.5
  Top w3.94: J4.10@487.01,2397.24 487.01,2340.55 474.41,2327.95 474.41,2159.45 651.57,1982.28 1100.25,1982.28 1108.13,1974.41 1141.73,1974.41 v1(1147.64,1968.5) ; U1.202@1107.28,1527.56 1102.36,1532.48 1102.36,1584.65 v1(1108.27,1590.55)
  Bottom w3.94: v1(1108.27,1590.55) 1102.36,1596.46 1102.36,1956.69 1120.08,1974.41 1141.73,1974.41 v1(1147.64,1968.5)
POWER-KEY: ED8128.1 SW9209.2 U1.237 | length 3913.8
  Top w3.94: U1.237@762.8,1850.39 763.78,1850.39 v1(763.78,1803.15) ; SW9209.2@3360.24,9.84 ED8128.1@3360.24,74.8 v1(3360.24,102.36)
  内层3 w3.94: v1(763.78,1803.15) 763.78,1722.64 1035.63,1450.79 1058.18,1450.79 1301.18,1207.79 1301.18,1087.16 1316.93,1071.41 1316.93,770.98 1356.3,731.61 1356.3,427.17 1393.7,389.76 1641.73,389.76 1716.54,314.96 2691.62,314.96 2742.8,263.78 3198.82,263.78 v1(3360.24,102.36)
PWR_BTN: R9.1 U1.240 | length 670.9
  Top w3.94: R9.1@405.51,1976.38 v1(429.13,1976.38) ; v1(673.23,1606.3) 720.47,1606.3 733.27,1593.5 U1.240@733.27,1527.56
  Bottom w3.94: v1(429.13,1976.38) 505.71,1976.38 622.05,1860.04 622.05,1657.48 v1(673.23,1606.3)
RESET_L: R122.2 U1.239 U37.4 | length 5560
  Top w3.94: v1(417.32,1834.65) 486.22,1903.54 718.98,1903.54 735.81,1886.71 735.81,1886.23 743.11,1878.94 U1.239@743.11,1850.39 ; v1(521.65,537.4) 531.5,537.4 562.99,505.91 598.8,505.91 740.54,364.17 964.57,364.17 1025.59,425.2 1256.52,425.2 1352.98,328.74 v1(1539.37,328.74) ; U37.4@3066.93,952.76 v1(3066.93,974.41) R122.2@3066.93,992.13
  内层3 w3.94: v1(1539.37,328.74) 1683.07,328.74 1704.72,307.09 2687.01,307.09 2730.32,263.78 v1(2730.32,253.94)
  Bottom w3.94: v1(417.32,1834.65) 399.61,1816.93 399.61,1056.47 377.95,1034.82 377.95,971.24 385.83,963.37 385.83,618.73 467.15,537.4 v1(521.65,537.4) ; v1(2730.32,253.94) 2730.32,255.91 3180.9,255.91 3216.54,291.54 3216.54,962.6 3190.94,988.19 3080.71,988.19 v1(3066.93,974.41)
RIGHT-ACT: R77.1 U1.194 | length 1882.4
  Top w3.94: R77.1@330.71,2716.54 314.96,2700.79 314.96,2663.39 322.83,2655.51 322.83,2471.91 431.1,2363.64 431.1,2127.95 v1(586.61,1972.44) ; U1.194@1186.02,1527.56 1187.01,1527.56 v1(1187.01,1480.32)
  Bottom w3.94: v1(586.61,1972.44) 622.05,1937.01 682.4,1937.01 767.04,1852.36 992.13,1852.36 1011.81,1832.68 1011.81,1547.92 1053.83,1505.91 1159.45,1505.91 1185.04,1480.32 v1(1187.01,1480.32)
RK803_EN1_FLOOD: R113.2 R95171.2 U1.130 U30.4 U34.4 | length 1685.5
  Top w3.94: v1(1657.48,2102.36) R113.2@1675.2,2102.36 ; U1.130@1894.69,1527.56 1894.69,1567.91 1911.42,1584.65 1985.91,1584.65 2090.24,1688.98 2257.87,1688.98 v1(2261.81,1692.91) ; U34.4@2269.69,2066.93 2271.65,2064.96 v1(2271.65,2027.56) 2273.62,2027.56 2281.5,2019.69 R95171.2@2299.21,2019.69
  Top w7.87: R113.2@1675.2,2102.36 1675.2,2141.73 U30.4@1692.92,2141.73
  Bottom w3.94: v1(1657.48,2102.36) 1671.26,2116.14 2265.55,2116.14 2285.43,2096.26 2285.43,2039.37 ; v1(2261.81,1692.91) 2285.43,1716.54 2285.43,2039.37 ; v1(2271.65,2027.56) 2271.65,2029.53 2269.69,2027.56 2273.62,2027.56 2285.43,2039.37
RK803_EN2_PRO: U1.206 U5.B3 | length 775.2
  Top w3.94: U5.B3@370.08,1637.8 769.69,1637.8 787.4,1655.51 913.58,1655.51 960.83,1608.27 1016.23,1608.27 1067.91,1556.58 U1.206@1067.91,1527.56
RTC_INT_L: U1.218 U5.C3 | length 984.3
  Top w3.94: U5.C3@370.08,1618.11 462.6,1618.11 468.5,1612.2 468.5,1446.85 v1(539.37,1375.98) ; v1(706.69,1320.87) 732.28,1346.46 823.88,1346.46 949.8,1472.38 U1.218@949.8,1527.56
  Bottom w3.94: v1(539.37,1375.98) 539.37,1301.18 547.24,1293.31 659.45,1293.31 687.01,1320.87 v1(706.69,1320.87)
RX_UP_N: C71.2 U24.71 | length 64.9
  Top w3.94: C71.2@2405.51,1017.72 2397.64,1009.84 2397.64,1005.23 2409.45,993.42 2409.45,978.35 2413.39,974.41 U24.71@2413.39,962.6
RX_UP_P: C70.2 U24.72 | length 64.9
  Top w3.94: C70.2@2381.89,1017.72 2389.76,1009.84 2389.76,1001.97 2401.57,990.16 2401.57,978.35 2397.64,974.41 U24.72@2397.64,962.6
SARADC_VIN0_BOOT: ED4807.1 SW9208.2 U1.214 | length 2134.2
  Top w3.94: v1(838.58,100.39) 838.58,98.92 840.55,96.95 ED4807.1@840.55,78.74 840.55,77.76 853.35,64.96 853.35,30.51 842.52,19.69 SW9208.2@842.52,9.84 ; v1(897.64,1385.83) 897.64,1391.06 989.17,1482.59 U1.214@989.17,1527.56
  内层3 w3.94: v1(838.58,100.39) 769.69,169.29 752.17,169.29 500,421.46 500,1363.98 561.22,1425.2 858.27,1425.2 v1(897.64,1385.83)
SDMMC_CLK: D9.1 J9813.5 U1.229 | length 2707.5
  Top w3.94: v1(592.52,1145.67) 592.52,1135.83 574.8,1118.11 574.8,621.97 618.03,578.74 v1(671.26,578.74) ; U1.229@841.54,1850.39 842.52,1850.39 v1(842.52,1803.15) ; v1(921.26,94.49) 994.86,94.49 1003.31,86.04 D9.1@992.08,74.8 1001.92,84.65 1213.58,84.65 1223.92,74.31 J9813.5@1223.92,37.7
  Bottom w3.94: v1(592.52,1145.67) 600.39,1153.54 600.39,1177.03 803.15,1379.78 803.15,1727.89 826.77,1751.51 826.77,1787.4 v1(842.52,1803.15) ; v1(671.26,578.74) 773.62,578.74 828.74,523.62 828.74,149.38 862.2,115.92 862.2,74.8 854.33,66.93 830.91,66.93 822.83,58.86 822.83,31.5 828.74,25.59 901.57,25.59 915.35,39.37 915.35,88.58 v1(921.26,94.49)
SDMMC_CMD: R140.1 U1.227 | length 2078
  Top w3.94: v1(625.98,1145.67) 618.57,1138.25 618.57,1128.41 594.49,1104.33 594.49,647.84 622.25,620.08 651.57,620.08 v1(667.32,635.83) ; U1.227@861.22,1850.39 860.24,1849.41 860.24,1809.06 v1(881.89,1787.4) ; v1(881.89,157.48) 891.73,149.61 895.67,149.61 R140.1@895.67,145.67
  Bottom w3.94: v1(625.98,1145.67) 635.83,1155.51 635.83,1184.62 822.83,1371.63 822.83,1719.74 881.89,1778.79 v1(881.89,1787.4) ; v1(667.32,635.83) 667.32,637.8 744.09,637.8 761.81,620.08 795.28,620.08 862.2,553.15 862.2,177.17 v1(881.89,157.48)
SDMMC_D0: R141.1 U1.219 | length 2098.1
  Top w3.94: v1(627.95,633.86) 602.36,659.45 602.36,1101.07 639.76,1138.47 639.76,1143.7 v1(665.35,1169.29) ; R141.1@883.86,90.55 883.86,98.43 887.8,102.36 v1(887.8,112.2) ; U1.219@939.96,1850.39 940.94,1850.39 v1(940.94,1807.09)
  Bottom w3.94: v1(627.95,633.86) 651.57,610.24 783.27,610.24 846.46,547.05 846.46,163.68 879.39,130.75 879.39,120.61 v1(887.8,112.2) ; v1(665.35,1169.29) 665.35,1180.74 846.46,1361.84 846.46,1709.95 919.29,1782.79 919.29,1785.43 v1(940.94,1807.09)
SDMMC_D1: R142.1 U1.221 | length 2188.7
  Top w3.94: v1(625.98,655.51) 610.24,671.26 610.24,1097.81 662.03,1149.61 v1(665.35,1149.61) ; R142.1@883.86,66.93 891.16,59.63 891.16,47.24 v1(889.76,47.24) ; U1.221@920.28,1850.39 920.28,1808.07 v1(940.94,1787.4)
  Bottom w3.94: v1(625.98,655.51) 748.78,655.51 774.37,629.92 796.57,629.92 872.05,554.44 872.05,189.96 901.57,160.43 901.57,105.96 889.76,94.15 v1(889.76,47.24) ; v1(665.35,1149.61) 679.13,1163.39 679.13,1183.38 854.33,1358.58 854.33,1706.69 935.04,1787.4 v1(940.94,1787.4)
SDMMC_D2: R138.1 U1.223 | length 2018.3
  Top w3.94: v1(673.23,1110.24) 659.45,1124.02 647.58,1124.02 618.11,1094.55 618.11,746.57 632.4,732.28 767.72,732.28 781.5,718.5 v1(781.5,653.54) ; v1(887.8,234.25) 892.86,216.54 R138.1@895.67,216.54 ; U1.223@900.59,1850.39 900.59,1807.09 v1(901.57,1807.09)
  Bottom w3.94: v1(673.23,1110.24) 651.57,1131.89 651.57,1178.1 838.58,1365.1 838.58,1713.22 903.54,1778.18 903.54,1805.12 v1(901.57,1807.09) ; v1(781.5,653.54) 778.54,650.59 789.37,639.76 814.96,639.76 885.83,568.9 885.83,236.22 v1(887.8,234.25)
SDMMC_D3: R139.1 U1.225 | length 2009.2
  Top w3.94: v1(653.54,1110.24) 625.98,1082.68 625.98,752.17 637.8,740.36 771.32,740.36 793.31,718.36 793.31,661.42 v1(801.18,653.54) ; U1.225@880.91,1850.39 881.89,1850.39 v1(881.89,1807.09) ; v1(887.8,196.85) 887.8,188.98 R139.1@895.67,181.1
  Bottom w3.94: v1(653.54,1110.24) 643.7,1120.08 643.7,1181.36 830.71,1368.37 830.71,1716.48 895.67,1781.44 895.67,1793.31 v1(881.89,1807.09) ; v1(801.18,653.54) 818.9,653.54 897.64,574.8 897.64,246.06 903.54,240.16 903.54,212.6 v1(887.8,196.85)
SDMMC_DET_L: R145.1 U1.208 | length 206.8
  Top w3.94: U1.208@1048.23,1527.56 1048.23,1470.47 1072.83,1445.87 1072.83,1381.89 1072.83,1350.39 R145.1@1059.06,1336.61
SDMMC_PWREN: Q9539.3 R95118.1 U1.88 | length 515.4
  Top w3.94: U1.88@2308.07,1527.56 2308.07,1475.39 2312.99,1470.47 2539.37,1470.47 2553.63,1456.22 2553.63,1413.39 2566.93,1400.08 Q9539.3@2566.93,1305.12 ; Q9539.3@2566.93,1301.18 Q9539.3@2566.93,1305.12 ; R95118.1@2570.87,1259.84 2566.93,1259.84 Q9539.3@2566.93,1305.12
SPI0-CS0: CON1.24 U3.D1 | length 388.1
  Top w3.94: v1(279.53,775.59) 301.18,744.09 U3.D1@342.52,744.09
  Bottom w3.94: CON1.24@240.94,1040.94 301.18,980.71 301.18,781.5 296.28,781.5 290.37,775.59 v1(279.53,775.59)
SPI0-CS1: CON1.26 U5.A1 | length 859
  Top w3.94: v1(293.31,1657.48) U5.A1@330.71,1657.48
  Bottom w3.94: CON1.26@240.94,940.94 202.76,979.13 202.76,1574.8 216.54,1588.58 285.43,1588.58 307.09,1610.24 307.09,1643.7 v1(293.31,1657.48)
SPI0-MISO: CON1.21 U3.B1 | length 586.4
  Top w3.94: CON1.21@140.94,1140.94 100.39,1100.39 100.39,897.64 110.24,887.8 292.63,887.8 305.12,875.31 305.12,812.32 333.97,783.46 U3.B1@342.52,783.46
SPI0-MOSI: CON1.19 U3.C1 | length 707.6
  Top w3.94: CON1.19@140.94,1240.94 92.52,1192.52 92.52,894.38 106.97,879.92 289.37,879.92 297.24,872.05 297.24,809.06 U3.C1@342.52,763.78
SPI0-SCK: CON1.23 U3.A1 | length 380.1
  Top w3.94: CON1.23@140.94,1040.94 181.1,1000.79 181.1,927.17 212.6,895.67 295.89,895.67 312.99,878.57 312.99,815.58 325.42,803.15 U3.A1@342.52,803.15
SPI1-CS0: CON1.18 U4.D1 | length 605.7
  Top w3.94: CON1.18@240.94,1340.94 188.98,1288.98 188.98,930.43 215.86,903.54 320.87,903.54 U4.D1@342.52,881.89
SPI1-CS1: CON1.16 U6.A1 | length 408.6
  Top w3.94: v1(314.96,1803.15) U6.A1@330.71,1803.15
  Bottom w3.94: CON1.16@240.94,1440.94 314.96,1514.96 v1(314.96,1803.15)
SPI1-MISO: CON1.22 U4.B1 | length 335.2
  Top w3.94: CON1.22@240.94,1140.94 196.85,1096.85 196.85,1003.94 204.72,996.06 253.94,996.06 316.93,933.07 330.71,933.07 U4.B1@342.52,921.26
SPI1-MOSI: CON1.37 U4.C1 | length 743.2
  Top w3.94: v1(287.4,921.26) 322.83,921.26 U4.C1@342.52,901.57
  Bottom w3.94: CON1.37@140.94,340.94 191.73,391.73 242.51,391.73 276.85,426.07 276.85,757.3 265.75,768.4 265.75,798.13 287.4,819.79 v1(287.4,921.26)